# EAGLE board Emat (EAGLE 7.5.0)

Size 100 x 80 mm. Coordinates in mm from the lower left corner, seen from the top.
Outline: 0,0 100,0 100,80 0,80 0,0
Copper layers (1*16): Top 0.035mm / dielectric 1.5mm / Bottom 0.035mm
Design rules "default": minimum track width 10mil, minimum drill 24mil, track to track 8mil, track to pad 8mil, pad to pad 8mil, via to via 8mil, smd to smd 8mil, copper to edge 40mil, drill to drill 8mil, minimum pad ring 10mil, minimum via ring 8mil, stop-mask expansion 4mil, vias tented up to drill 0mil, thermal gap 10mil

## Footprints (pad centres in the part's own frame; a part is rotated, then mirrored left to right if it is on the bottom)
C10B4 = drill 1.016 pad 2.159 octagon: 1 -5.08,0; 2 5.08,0
C27.5B13 = drill 1.194 pad 3.15 octagon: 1 -13.716,0; 2 13.716,0
SANYO-OSCON_G = drill 0.8 pad 1.27: + 2.5,0; - -2.5,0
C0805 = smd 1.3 x 1.5: 1 -0.95,0; 2 0.95,0
C075-042X103 = drill 0.914 octagon: 1 -3.81,0; 2 3.81,0
DO41-10 = drill 1.118: A 5.08,0; C -5.08,0
SMC = smd 2.8 x 3.8: A 3.7,0; C -3.7,0
62221 = drill 2.921 pad 5.08 long: 1 0,0
TO220BVH = drill 1.016 long: D 0,-6.35; G -2.54,-2.54; S 2.54,-2.54
R1206 = smd 1.6 x 1.803: 1 -1.422,0; 2 1.422,0
R2512 = smd 1.8 x 3.2: 1 -2.8,0; 2 2.8,0
SOIC127P600X175-8N = smd 1.981 x 0.559: 1 -2.464,1.905; 2 -2.464,0.635; 3 -2.464,-0.635; 4 -2.464,-1.905; 5 2.464,-1.905; 6 2.464,-0.635; 7 2.464,0.635; 8 2.464,1.905
J502-ND = drill 1: 1 0,0 | drill 1.5: 2 -4.25,0.4; 3 4.25,0.4 | drill 1.3 long: 4 4.25,-2.65; 5 -4.25,-2.65

## Placement (x,y rotation side)
C1  4.7n 1000V  [C10B4]  90.17,73.66 0 top
C2  4.7n 1000V  [C10B4]  90.17,68.58 0 top
C3  4.7n 1000V  [C10B4]  90.17,62.23 0 top
C4  1uF 400V  [C27.5B13]  17.78,62.23 270 top
C5  47uF 400V  [SANYO-OSCON_G]  8.89,69.85 0 top
C6  1uF 16V  [C0805]  57.15,68.58 90 top
C7  1uF 16V  [C0805]  52.07,68.58 90 top
C9  220pF 1000V  [C075-042X103]  -63.5,-5.08 0 top  (outside the outline)
D1  MUR160  [DO41-10]  88.9,43.18 180 top
D2  MUR160  [DO41-10]  88.9,36.83 180 top
D3  ES3B  [SMC]  46.99,48.26 90 top
D4  ES3B  [SMC]  38.1,48.26 270 top
J1  PIN1-2  [62221]  36.83,34.29 0 top
J2  PIN1-2  [62221]  35.56,62.23 0 top
J3  PIN1-2  [62221]  50.8,34.29 0 top
J4  PIN1-2  [62221]  74.93,35.56 0 top
J5  PIN1-2  [62221]  66.04,55.88 0 top
J6  PIN1-2  [62221]  -6.35,6.35 0 top  (outside the outline)
J7  PIN1-2  [62221]  -17.78,6.35 0 top  (outside the outline)
J8  PIN1-2  [62221]  -29.21,6.35 0 top  (outside the outline)
J9  PIN1-2  [62221]  -40.64,6.35 0 top  (outside the outline)
J10  PIN1-2  [62221]  -52.07,6.35 0 top  (outside the outline)
J11  PIN1-2  [62221]  -63.5,6.35 0 top  (outside the outline)
Q2  STP13NM60NTO220BVH  [TO220BVH]  73.66,66.04 90 top
R1  51  [R1206]  46.99,62.23 0 top
R2  3.3  [R1206]  67.31,63.5 0 top
R3  270  [R2512]  38.1,74.93 180 top
R4  270  [R2512]  67.31,74.93 0 top
R5  270  [R2512]  57.15,74.93 0 top
R6  270  [R2512]  48.26,74.93 0 top
R7  270  [R2512]  29.21,74.93 0 top
R8  1K  [R1206]  69.85,48.26 180 top
R10  510  [R1206]  80.01,53.34 180 top
R11  510  [R1206]  80.01,48.26 0 top
R40  22K  [R2512]  91.44,55.88 180 top
R41  22K  [R2512]  91.44,49.53 180 top
U1  UCC27324D  [SOIC127P600X175-8N]  55.88,62.23 0 top
X1  SMA-J502-ND  [J502-ND]  20.32,34.29 270 top

## Library data of the parts
C1-C4 = capacitor-wima
C5-C7 C9 R1 R2 R8 R10 R11 R40 R41 = rcl
D1-D4 = diode
J1-J11 = con-faston; MF: TYCO ELECTRONICS; MPN: 62221-1; OC_FARNELL: unknown; OC_NEWARK: 16H2318
Q2 = transistor-power
R3-R7 = resistor
U1 = UCC27324D
X1 = con-coax; OC_FARNELL: unknown; OC_NEWARK: unknown

## Nets
+12V: C6.1 C7.1 J7.1 U1.6
+UB: C4.1 C5.+ J8.1 R7.1
GND: C4.2 C5.- C6.2 C7.2 D3.A D4.C J2.1 J6.1 J9.1 J11.1 Q2.S R8.1 R40.2 R41.2 U1.3 X1.2 X1.3 X1.4 X1.5
N$1: R1.2 U1.2
N$2: R2.1 U1.7
N$3: Q2.G R2.2
N$4: C1.1 C2.1 C3.1 Q2.D R4.2
N$5: J10.1 R1.1
N$6: R4.1 R5.2
N$7: R5.1 R6.2
N$8: R3.1 R6.1
N$9: R3.2 R7.2
N$10: D3.C D4.A J1.1 J3.1 X1.1
N$11: R8.2 U1.4
N$12: J5.1 U1.5
N$13: C9.2 R10.1
N$14: R10.2 R11.1
N$15: D1.A D2.A J4.1 R11.2
N$16: C1.2 C2.2 C3.2 C9.1 D1.C D2.C R40.1 R41.1

## Tracks (layer width: path | path; a pad name or v marks a point on that pad's centre or on a via)
+12V  (3 unrouted)
+UB  (3 unrouted)
GND  (18 unrouted)
N$1  (1 unrouted)
N$2  (1 unrouted)
N$3  (1 unrouted)
N$4  (4 unrouted)
N$5  (1 unrouted)
N$6  (1 unrouted)
N$7  (1 unrouted)
N$8  (1 unrouted)
N$9  (1 unrouted)
N$10  (4 unrouted)
N$11  (1 unrouted)
N$12  (1 unrouted)
N$13  (1 unrouted)
N$14  (1 unrouted)
N$15  (3 unrouted)
N$16  (7 unrouted)